# Altium PCB DE-130817.PcbDoc (part 4 of 4)
Units mil, origin at the board's own origin, x right, y up, seen from the top; angles counter-clockwise.
Board outline 5915.54 x 7594.09 mil, 2 copper layers (Top Layer, Bottom Layer), stack 12.8 mil thick; 405 components, 290 nets, 1180 pads, 331 vias.
Unrouted connection lines stored in the file: 1.
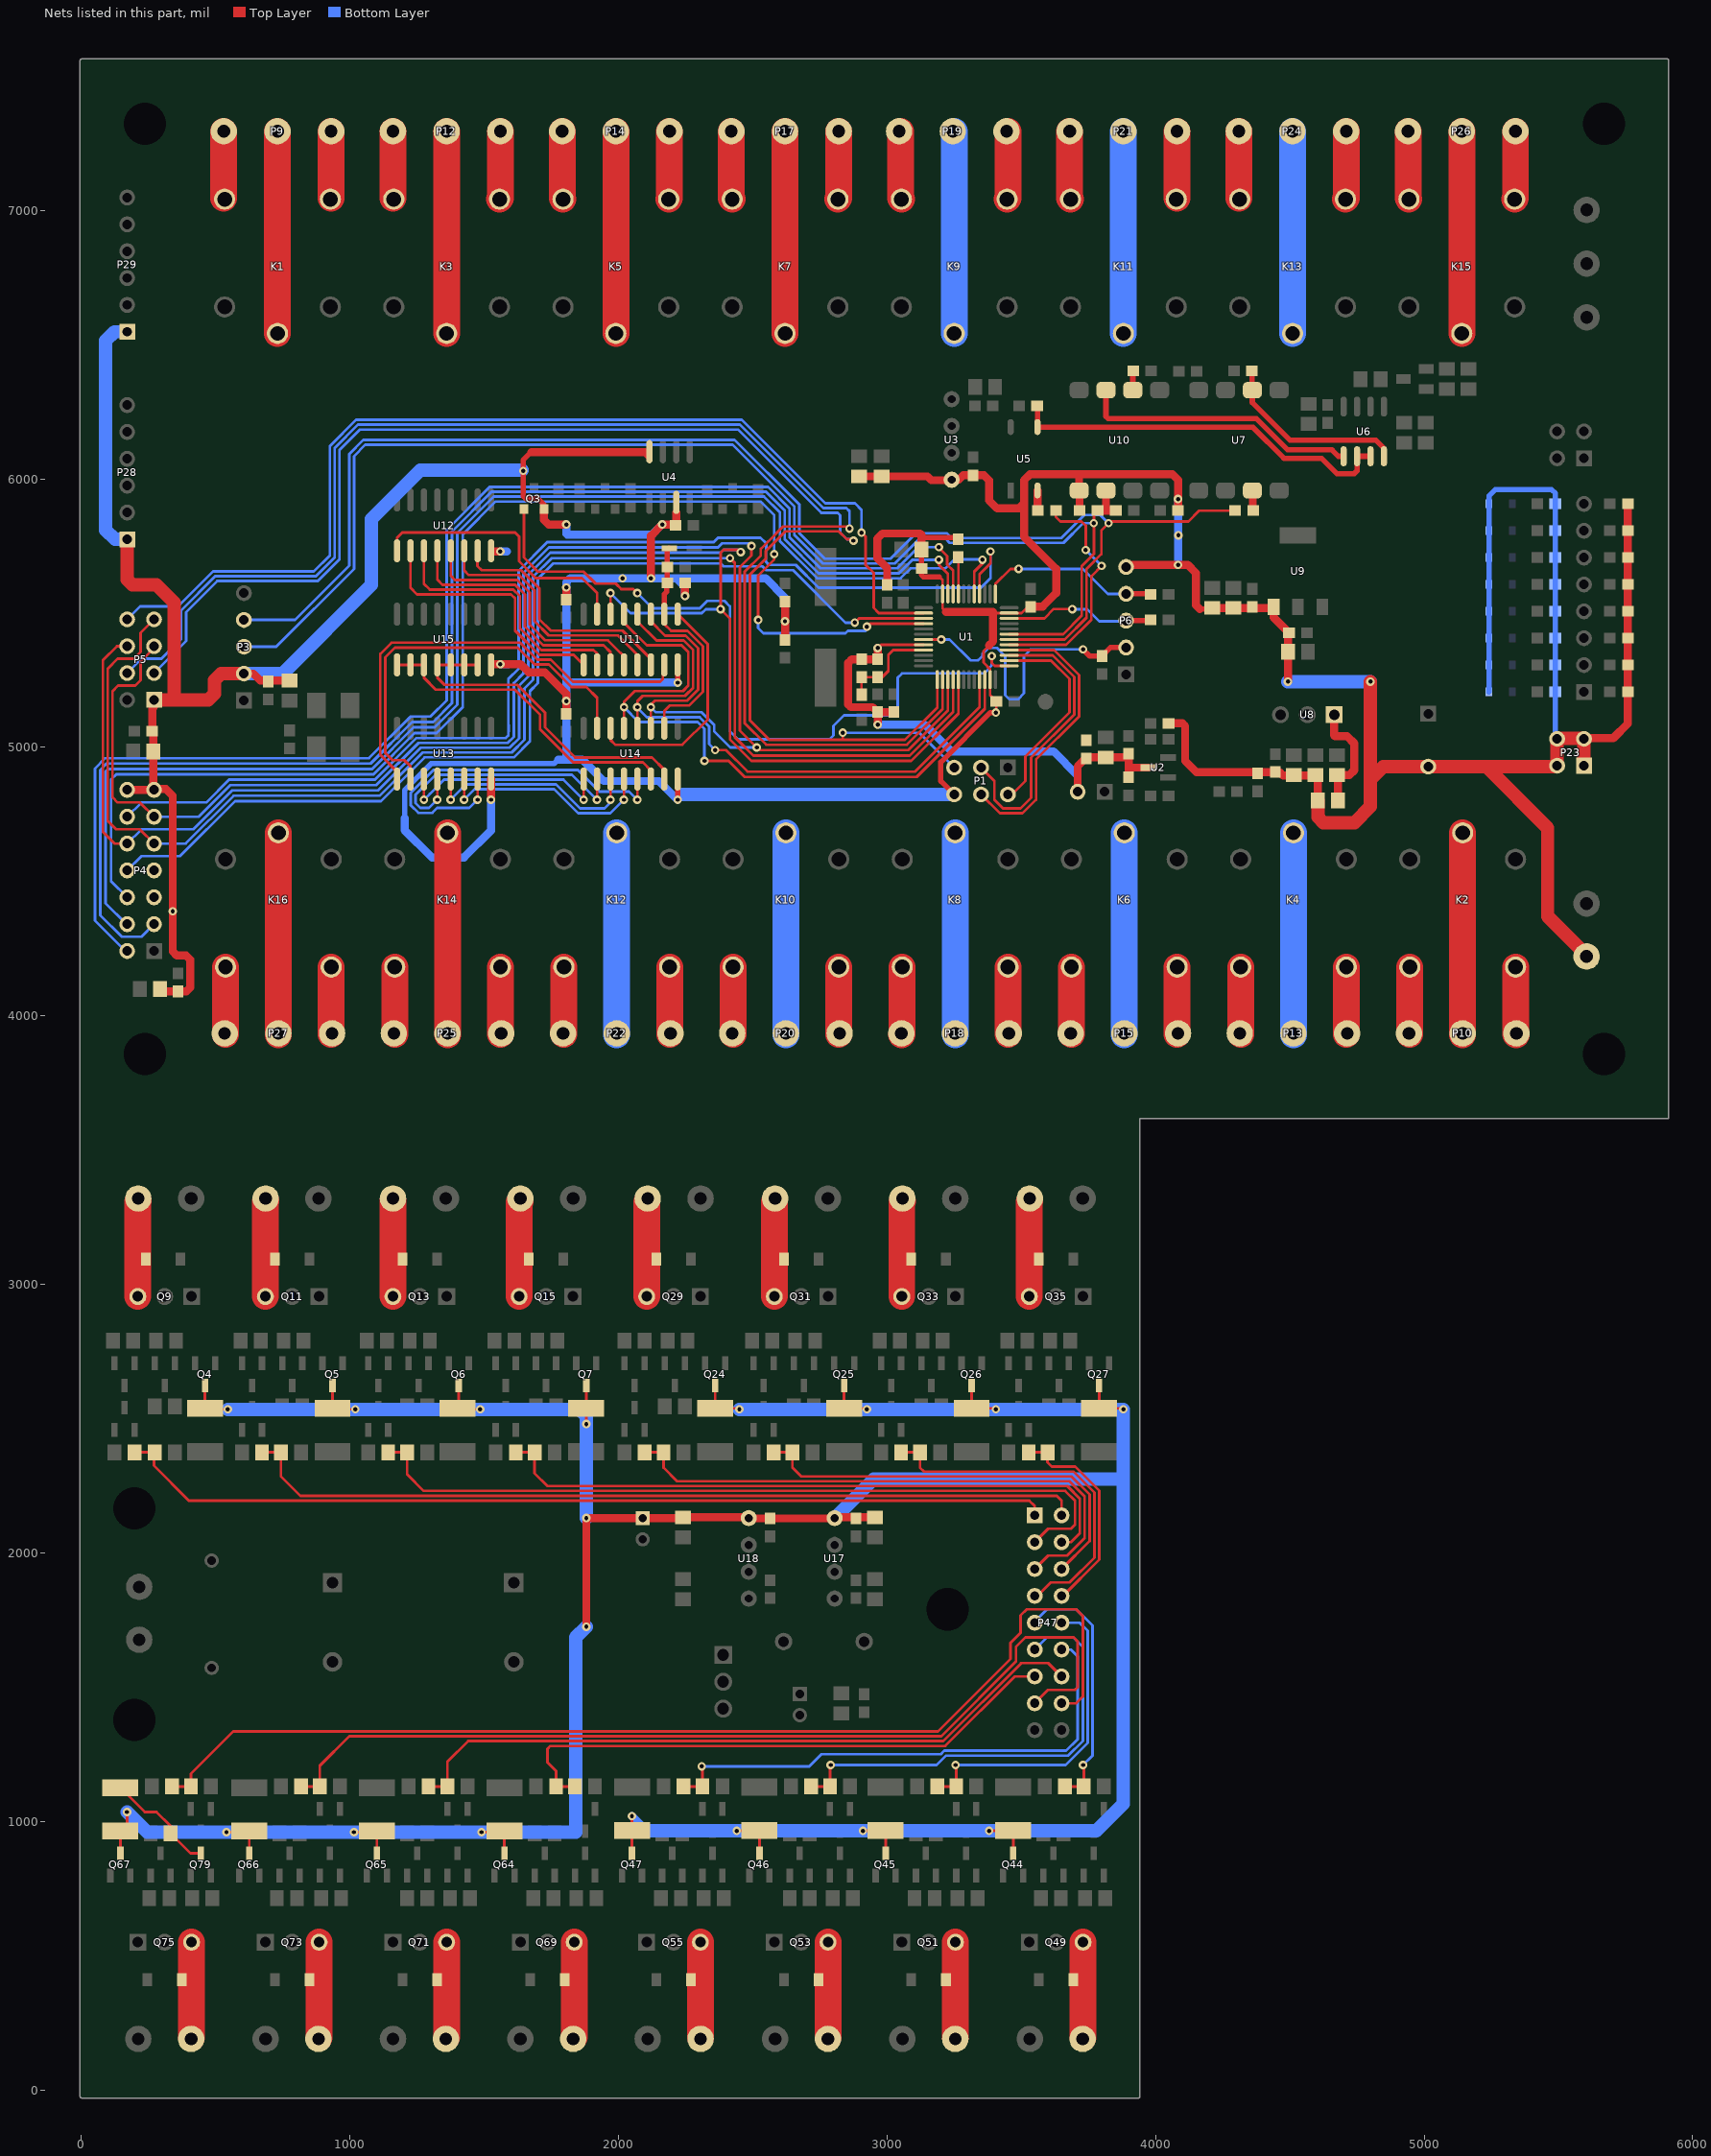
[diagram p3: the nets of this part, all layers, seen from the top]

## Via types
v1: diameter 31.5, hole 15.75, Top Layer to Bottom Layer, 331 vias

## Nets (pads, with @x,y where several pads share a name; then routed paths per layer and width w, separated by ;. In a path a pad name is that pad's centre, name@x,y a point inside that pad or via, vN(x,y) a via of type N, cw(c..) or ccw(c..) an arc to the next point about the centre after c; other vN are vias at no path point) (continued)
NetQ79_3: Q79.3 R122.1 R132.2 | length 417.3
  Top Layer w10: R122.1@145,1125.71 235.71,1035 279.8,1035 332.4,982.4 R132.2@332.4,955 406.06,881.34 Q79.3@445,881.34
NetR4_1: R4.1 U1.44 | length 136.6
  Top Layer w10: U1.44@3265.79,5571.45 R4.1@3265.79,5708.06
NetR9_1: R9.1 U5.2 | length 75.6
  Top Layer w30: U5.2@3560.32,5957 3560.32,5883.54 R9.1@3561.85,5882
NetR10_1: R10.1 U5.3 U6.2 U6.3 | length 1449.6
  Top Layer w20: R10.1@3558.78,6272 3560.32,6270.46 U5.3@3560.32,6193.22 3561.54,6192 4363,6192 4478,6077 4618,6077 4675,6020 4740,6020 4750,6030 4750,6084.16 U6.2@4750.32,6084.48 U6.3@4800.32,6084.48
NetR12_2: R12.2 U6.4 U7.6 | length 708.6
  Top Layer w20: R12.2@4358.78,6402 4358.78,6332.55 U7.6@4360.32,6331.02 4360.32,6284.68 4500,6145 4820,6145 4850.32,6114.68 U6.4@4850.32,6084.48
NetR15_2: R15.2 U7.3 | length 75.6
  Top Layer w30: U7.3@4360.32,5957 4361.85,5955.46 R15.2@4361.85,5882
NetR18_1: R18.1 U10.2 | length 71.6
  Top Layer w20: U10.2@3915.32,6331.02 3915.32,6400.46 R18.1@3916.85,6402
NetR20_1: R20.1 R21.2 U8.1 | length 433.2
  Top Layer w30: U8.1@4665.32,5122 4665,5121.68 4665,5045 4668.34,5041.66 4713.34,5041.66 4740,5015 4740,4915 4721.72,4896.72 R21.2@4675.32,4896.72 4679.25,4892.79 R20.1@4679.25,4802
NetU6_1: U6.1 U10.3 | length 1044.6
  Top Layer w20: U10.3@3815.32,6331.02 3815.32,6232.9 3823.22,6225 4375,6225 4492,6108 4657,6108 4680.52,6084.48 U6.1@4700.32,6084.48
NetU11_1: U11.1 U12.2 | length 972.1
  Top Layer w10: U12.2@1225.32,5732.51 1225.32,5594.68 1250,5570 1600,5570 1615,5555 1615,5435 1705,5345 1832.83,5345 U11.1@1870.32,5307.51
NetU11_2: U11.2 U12.3 | length 988
  Top Layer w10: U12.3@1275.32,5732.51 1275.32,5609.68 1297,5588 1607.46,5588 1633,5562.46 1633,5442.46 1712.46,5363 1907,5363 1920.32,5349.68 U11.2@1920.32,5307.51
NetU11_3: U11.3 U12.4 | length 982.1
  Top Layer w10: U12.4@1325.32,5732.51 1325.32,5624.68 1344,5606 1614.91,5606 1651,5569.91 1651,5449.91 1719.91,5381 1944,5381 1970.32,5354.68 U11.3@1970.32,5307.51
NetU11_4: U11.4 U12.5 | length 964.6
  Top Layer w10: U12.5@1375.32,5732.51 1375.32,5639.68 1391,5624 1622.37,5624 1669,5577.37 1669,5457.37 1727.37,5399 1960.23,5399 2007.54,5351.68 2008.32,5351.68 2020.32,5339.68 U11.4@2020.32,5307.51
NetU11_5: U11.5 U12.6 | length 952.7
  Top Layer w10: U12.6@1425.32,5732.51 1425.32,5659.68 1443,5642 1629.82,5642 1687,5584.82 1687,5470 1740,5417 1998,5417 2070.32,5344.68 U11.5@2070.32,5307.51
NetU11_6: U11.6 U12.7 | length 935.4
  Top Layer w10: U12.7@1475.32,5732.51 1475,5732.2 1475,5675 1490,5660 1637.28,5660 1705,5592.28 1705,5477.46 1747.46,5435 2015,5435 2120.32,5329.68 U11.6@2120.32,5307.51
NetU11_7: U11.7 U13.1 | length 1679.6
  Top Layer w10: U13.1@1175.32,4882.51 1175.32,4909.68 1113,4972 1113,5348 1155,5390 1634.54,5390 1697.54,5327 1748,5327 1830,5245 2155,5245 2165,5255 2165,5302.2 U11.7@2170.32,5307.51
NetU11_9: U11.9 U14.14 | length 890.5
  Top Layer w10: U14.14@1970.32,5071.49 1970.32,5027.68 1988,5010 2238,5010 2332,5104 2332,5384.82 U11.9@2220.32,5496.49
NetU11_15: U11.15 U12.1 | length 1026.5
  Top Layer w10: U12.1@1175.32,5732.51 1175.32,5780.32 1195,5800 1615,5800 1630,5785 1630,5692.73 1691.73,5631 1864,5631 1920.32,5574.68 U11.15@1920.32,5496.49
NetU13_2: U13.2 U14.15 | length 1513.7
  Top Layer w10: U13.2@1225.32,4882.51 1225.32,4929.68 1202.27,4952.73 1157.73,4952.73 1131,4979.46 1131,5336 1167,5372 1625,5372 1688,5309 1740.54,5309 1824.54,5225 1880,5225 1920.32,5184.68 U14.15@1920.32,5071.49
NetU13_3: U13.3 U14.1 | length 811.5
  Top Layer w10: v1@1275.32,4805.32 U13.3@1275.32,4882.51 ; v1@1870.32,4805.32 U14.1@1870.32,4882.51
  Bottom Layer w10: v1(1275,4805) 1297,4827 1297.46,4827 1350.46,4880 1795,4880 v1(1870,4805)
NetU13_4: U13.4 U14.2 | length 1032.8
  Top Layer w10: v1(1325,4805) 1325.32,4805.32 U13.4@1325.32,4882.51 ; v1(1920,4805) 1920.32,4805.32 U14.2@1920.32,4882.51
  Bottom Layer w10: v1(1325,4805) 1294.25,4774.25 1262.26,4774.25 1244.25,4792.26 1244.25,4823.8 1318.46,4898 1827,4898 v1(1920,4805)
NetU13_5: U13.5 U14.3 | length 829.4
  Top Layer w10: v1@1375.32,4805.32 U13.5@1375.32,4882.51 ; v1(1970,4805) 1970.32,4805.32 U14.3@1970.32,4882.51
  Bottom Layer w10: v1(1375,4805) 1432,4862 1768,4862 1857,4773 1948,4773 1970,4795 v1(1970,4805)
NetU13_6: U13.6 U14.4 | length 823.1
  Top Layer w10: v1@1425.32,4805.32 U13.6@1425.32,4882.51 ; v1@2020.32,4805.32 U14.4@2020.32,4882.51
  Bottom Layer w10: v1(1425,4805) 1464,4844 1760.54,4844 1849.54,4755 1970,4755 v1(2020,4805)
NetU13_7: U13.7 U14.5 | length 1406.9
  Top Layer w10: v1@1475.32,4805.32 U13.7@1475.32,4882.51 ; v1(2070,4805) 2070.32,4805.32 U14.5@2070.32,4882.51
  Bottom Layer w10: v1(1475,4805) 1444.25,4774.25 1324.25,4774.25 1306.25,4756.25 1254.81,4756.25 1226.25,4784.81 1226.25,4831.25 1311,4916 1849,4916 1929.25,4835.75 2039.25,4835.75 v1(2070,4805)
NetU14_6: U14.6 U15.1 U15.2 U15.3 | length 1200.1
  Top Layer w10: U15.1@1175.32,5307.51 U15.2@1225.32,5307.51 U15.3@1275.32,5307.51 1275.32,5259.68 1320,5215 1615,5215 1708,5122 1708,5067 1831,4944 2091,4944 2120.32,4914.68 U14.6@2120.32,4882.51
NetU14_7: U14.7 U15.4 U15.5 U15.6 U15.7 | length 1251.3
  Top Layer w10: U15.7@1475.32,5307.51 U15.6@1425.32,5307.51 U15.5@1375.32,5307.51 U15.4@1325.32,5307.51 1325.32,5259.68 1352,5233 1622.46,5233 1726,5129.46 1726,5074.46 1838.46,4962 2125,4962 2170.32,4916.68 U14.7@2170.32,4882.51
NRF24L01_CE: P1.5 P5.3 U1.13 | length 5889
  Top Layer w10: 2835,5028 v1(2835,5055) ; v1@2870,5775 2850,5775 2820,5805 2621.52,5805 2548,5731.48 2548,5703 2489.25,5644.25 2489.25,5100.75 2562,5028 3066.18,5028 3187.05,5148.87 U1.13@3187.05,5252.55
  Bottom Layer w10: P5.3@270.32,5277 390,5396.68 390,5504.09 505.44,5619.53 880.53,5619.53 961,5700 961,6107.37 1037.63,6184 2444.65,6184 2755.09,5873.56 2816.44,5873.56 2825,5865 2825,5800 2850,5775 2870,5775 v1(2875,5770) ; v1(2835,5055) 2835.75,5054.25 3120.75,5054.25 P1.5@3250,4925
NRF24L01_CSN: P5.4 U1.14 | length 5562.8
  Top Layer w10: v1@2860,5810 2850,5820 2853,5823 2613.46,5823 2557.46,5767 2557,5767 2530,5740 2530,5715 2470,5655 2470,5090 2550,5010 3073.63,5010 3206.73,5143.1 U1.14@3206.73,5252.55
  Bottom Layer w10: P5.4@170.32,5277 213.32,5320 215,5320 225,5330 297.86,5330 370,5402.14 370,5509.54 497.98,5637.53 873.07,5637.53 943,5707.46 943,6114.82 1030.18,6202 2452.1,6202 2762.54,5891.56 2848.44,5891.56 2860,5880 v1@2860,5810
  other v1: 2860,5815
NRF24L01_IRQ: P5.8 U1.2 | length 3997.4
  Top Layer w10: v1(2905,5800) 2920,5785 2920,5680 2950,5650 2950,5520 2969.42,5500.58 U1.2@3135.87,5500.58
  Bottom Layer w10: P5.8@170.32,5477 218.32,5525 360,5525 490.53,5655.53 865.62,5655.53 925,5714.91 925,6122.28 1022.72,6220 2459.56,6220 2770,5909.56 2880.44,5909.56 2905,5885 v1(2905,5800)
NRF905_AM: P4.7
NRF905_CD: P4.6 U1.4 | length 4862.9
  Top Layer w10: v1(2520,5475) 2511,5475 2520,5484 2520,5640 2580,5700 v1(2580,5720) ; v1(2925,5450) 2936.21,5461.21 U1.4@3135.87,5461.21
  Bottom Layer w10: P4.6@170.32,4442 110,4502.32 110,4880 130,4900 1087.72,4900 1240.72,5053 1323,5053 1420,5150 1420,5793.63 1542.37,5916 2529,5916 2580,5865 v1(2580,5720) ; v1(2520,5475) 2520,5445 2540,5425 2845,5425 2854.25,5434.25 2919.25,5434.25 2925,5440 v1(2925,5450)
NRF905_CSN: P4.12 U1.40 | length 4391
  Top Layer w10: U1.40@3344.53,5571.45 3344.53,5645.04 3385.75,5686.26 v1@3385.75,5729.25
  Bottom Layer w10: P4.12@170.32,4742 223.32,4795 465,4795 550,4880 1093.18,4880 1248.18,5035 1580,5035 1590,5045 1590,5058 1590.75,5058.75 1590.75,5084.22 1590,5084.97 1590,5255 1628,5293 1628,5658 1734.72,5764.72 2354.72,5764.72 2370.75,5780.75 2529.25,5780.75 2550,5760 2550,5733.48 2549.25,5732.74 2549.25,5690.75 2560,5680 2660,5680 2745,5595 3350,5595 3385.75,5630.75 3385.75,5729.25 v1(3385,5730)
NRF905_DR: P4.8 U1.3 | length 3873.7
  Top Layer w10: v1(2880,5465) 2895.9,5480.9 U1.3@3135.87,5480.9
  Bottom Layer w10: P4.8@170.32,4542 223.32,4595 366.82,4595 571.82,4800 1115,4800 1278,4963 1609.82,4963 1670,5023.18 1670,5210 1700,5240 1700,5628 1757,5685 2380,5685 2390.75,5674.25 2535.75,5674.25 2550,5660 2650,5660 2845.58,5464.42 v1@2880,5464.42
NRF905_PWR_UP: P4.4 U1.41 | length 5025.2
  Top Layer w10: U1.41@3324.84,5571.45 3324.84,5654.84 3355,5685 v1(3355,5699)
  Bottom Layer w10: P4.4@170.32,4342 167.54,4342 90,4419.54 90,4910.91 99.09,4920 1082.27,4920 1237.27,5075 1315.46,5075 1400,5159.54 1400,5799.09 1534.91,5934 2541.91,5934 2601,5874.91 2601,5768.09 2739.09,5630 3050.91,5630 3087.96,5667.04 3217.04,5667.04 3250,5700 3354,5700 v1(3355,5699)
NRF905_TRX_CE: P4.3 U1.46 | length 5071.1
  Top Layer w10: v1(3193,5699) 3193,5680 3226.42,5646.58 U1.46@3226.42,5571.45
  Bottom Layer w10: P4.3@270.32,4342 223.32,4295 150,4295 70,4375 70,4916.37 93.63,4940 1076.81,4940 1231.81,5095 1310,5095 1380,5165 1380,5804.54 1527.46,5952 2549.37,5952 2619,5882.37 2619,5775.54 2745.54,5649 3044.46,5649 3094.46,5699 v1(3193,5699)
NRF905_TX_EN: P4.2 U1.45 | length 5097.8
  Top Layer w10: v1@3200,5736 3223.75,5712.25 3223.75,5681.25 3246.1,5658.9 U1.45@3246.1,5571.45 ; v1@3200,5746.75 v1@3200,5756.75
  Bottom Layer w10: P4.2@170.32,4242 162.54,4242 50,4354.54 50,4921.82 88.18,4960 1071.35,4960 1226.35,5115 1300,5115 1360,5175 1360,5810 1520,5970 2556.82,5970 2637,5889.82 2637,5783 2753,5667 3037,5667 3116,5746 v1(3193,5746)
NRF905_UCLK: P4.5
NRST: P6.2 R5.1 U1.7 | length 1156.5
  Top Layer w10: U1.7@3135.87,5402.16 3201.84,5402.16 v1(3202,5402)
  Top Layer w20: v1(3730,5365) 3754.54,5340.46 R5.1@3800.32,5340.46 3831.85,5372 P6.2@3890.32,5372
  Bottom Layer w10: v1(3202,5402) 3233,5402 3310.75,5324.25 3337.74,5324.25 3338.48,5325 3340,5325 3355.75,5340.75 3355.75,5349.23 3377.26,5370.75 3409.25,5370.75 3440,5340 3440,5195 3455.75,5179.25 3487.74,5179.25 3510,5201.52 3510,5340 3535,5365 v1(3730,5365)
PWM_0: P47.1 R51.1 R63.2 | length 3503.4
  Top Layer w10: R51.1@197.4,2375 R63.2@272.6,2375 270,2372.4 270,2325 400,2195 3530,2195 3550,2175 P47.1@3550,2140
PWM_0_OUT: D13.2 P30.1 Q9.3 | length 355.7
  Top Layer w100: Q9.3@210,2955 210,3308.43 P30.1@211.57,3310
PWM_1: P47.2 R53.1 R64.2 | length 3159.6
  Top Layer w10: R53.1@672.4,2375 R64.2@742.6,2375 742.6,2285.4 815,2213 3632,2213 3650,2195 P47.2@3650,2140
PWM_1_OUT: D14.2 P31.1 Q11.3 | length 355.4
  Top Layer w100: Q11.3@685,2955 685,3309.14 P31.1@685.86,3310
PWM_2: P47.3 R57.1 R65.2 | length 2946.9
  Top Layer w10: R57.1@1142.4,2375 R65.2@1212.6,2375 1212.6,2293.4 1275,2231 3664,2231 3700,2195 3700,2105 3685,2090 3600,2090 P47.3@3550,2040
PWM_2_OUT: D15.2 P32.1 Q13.3 | length 355.1
  Top Layer w100: Q13.3@1160,2955 1160,3309.85 P32.1@1160.15,3310
PWM_3: P47.4 R59.1 R66.2 | length 2429.2
  Top Layer w10: R59.1@1617.4,2375 R66.2@1687.6,2375 1687.6,2296.4 1735,2249 3671.46,2249 3718,2202.46 3718,2073 3685,2040 P47.4@3650,2040
PWM_3_OUT: D16.2 P33.1 Q15.3 | length 356.8
  Top Layer w100: Q15.3@1630,2955 1630,3305.57 P33.1@1634.43,3310
PWM_4: P47.5 R75.1 R87.2 | length 2128.7
  Top Layer w10: R75.1@2097.4,2375 R87.2@2167.6,2375 2167.6,2317.4 2218,2267 3678.91,2267 3736,2209.91 3736,2056 3670,1990 3600,1990 P47.5@3550,1940
PWM_4_OUT: D17.2 P34.1 Q29.3 | length 351.3
  Top Layer w100: Q29.3@2105,2955 P34.1@2105,3306.28
PWM_5: P47.6 R77.1 R88.2 | length 1596.1
  Top Layer w10: R77.1@2577.4,2375 R88.2@2647.6,2375 2647.6,2317.4 2680,2285 3686.37,2285 3754,2217.37 3754,2044 P47.6@3650,1940
PWM_5_OUT: D18.2 P35.1 Q31.3 | length 352
  Top Layer w100: Q31.3@2580,2955 P35.1@2580,3307
PWM_6: P47.7 R81.1 R89.2 | length 1339.2
  Top Layer w10: R81.1@3052.4,2375 R89.2@3122.6,2375 3122.6,2317.4 3137,2303 3693.82,2303 3772,2224.82 3772,1982 3680,1890 3610,1890 3560,1840 P47.7@3550,1840
PWM_6_OUT: D19.2 P36.1 Q33.3 | length 355.9
  Top Layer w100: Q33.3@3055,2955 3055,3307.71 P36.1@3057.29,3310
PWM_7: P47.8 R83.1 R90.2 | length 797.2
  Top Layer w10: R83.1@3527.4,2375 R90.2@3597.6,2375 3597.6,2337.4 3614,2321 3701.28,2321 3790,2232.28 3790,1974.54 3655.46,1840 P47.8@3650,1840
PWM_7_OUT: D20.2 P37.1 Q35.3 | length 355.7
  Top Layer w100: Q35.3@3530,2955 3530,3308.43 P37.1@3531.57,3310
PWM_8: P47.9 R99.1 R111.2 | length 945.6
  Top Layer w10: R111.2@3662.4,1130 R99.1@3732.6,1130 v1@3732.6,1207.4
  Bottom Layer w10: P47.9@3550,1740 3550,1745 3595,1790 3705,1790 3765,1730 3765,1245 v1(3730,1210)
PWM_8_OUT: D21.2 P39.1 Q49.3 | length 355
  Top Layer w100: P39.1@3730,195 Q49.3@3730,550
PWM_9: P47.10 R101.1 R112.2 | length 1201
  Top Layer w10: R112.2@3187.4,1130 R101.1@3257.6,1130 v1@3257.6,1207.4
  Bottom Layer w10: v1(3255,1210) 3665,1210 3747,1292 3747,1710 3717,1740 P47.10@3650,1740
PWM_9_OUT: D22.2 P40.1 Q51.3 | length 354.3
  Top Layer w100: P40.1@3255,195.71 Q51.3@3255,550
PWM_10: P47.11 R105.1 R113.2 | length 1689.9
  Top Layer w10: R113.2@2717.4,1130 R105.1@2787.6,1130 2787.6,1207.6 v1(2790,1210)
  Bottom Layer w10: v1(2790,1210) 3185,1210 3220.23,1245.23 3674.77,1245.23 3729,1299.46 3729,1650 3694,1685 3595,1685 P47.11@3550,1640
PWM_10_OUT: D23.2 P41.1 Q53.3 | length 353.6
  Top Layer w100: P41.1@2780,196.43 Q53.3@2780,550
PWM_11: P47.12 R107.1 R114.2 | length 1967.5
  Top Layer w10: R114.2@2242.4,1130 R107.1@2312.6,1130 2312.6,1202.4 v1(2310,1205)
  Bottom Layer w10: v1(2310,1205) 2710,1205 2755,1250 3199.54,1250 3212.77,1263.23 3667.32,1263.23 3710,1305.91 3710,1615 3685,1640 P47.12@3650,1640
PWM_11_OUT: D24.2 P42.1 Q55.3 | length 352.9
  Top Layer w100: P42.1@2305,197.14 Q55.3@2305,550
PWM_12: P47.13 R123.1 R135.2 | length 2150.5
  Top Layer w10: R123.1@1837.6,1130 R135.2@1767.4,1130 1767.4,1187.6 1735,1220 1735,1270 1746,1281 3216.91,1281 3475.91,1540 P47.13@3550,1540
PWM_12_OUT: D25.2 P43.1 Q69.3 | length 355.9
  Top Layer w100: P43.1@1832.86,195 1835,197.14 Q69.3@1835,550
PWM_13: P47.14 R125.1 R136.2 | length 2623
  Top Layer w10: R136.2@1292.4,1130 R125.1@1362.6,1130 1362.6,1221.6 1440,1299 3209.46,1299 3498,1587.54 3498,1588.46 3499.54,1590 3600,1590 P47.14@3650,1540
PWM_13_OUT: D26.2 P44.1 Q71.3 | length 353.6
  Top Layer w100: P44.1@1360,196.43 Q71.3@1360,550
PWM_14: P47.15 R129.1 R137.2 | length 3561.2
  Top Layer w10: R137.2@817.4,1130 R129.1@887.6,1130 887.6,1207.6 997,1317 3202,1317 3480,1595 3480,1650 3515,1685 3695,1685 3710,1670 3710,1500 3700,1490 3600,1490 P47.15@3550,1440
PWM_14_OUT: D27.2 P45.1 Q73.3 | length 355.3
  Top Layer w100: P45.1@884.29,195 885,195.71 Q73.3@885,550
PWM_15: P47.16 R131.1 R138.2 | length 4167.8
  Top Layer w10: R138.2@337.4,1130 R131.1@407.6,1130 407.6,1177.6 565,1335 3190,1335 3460,1605 3460,1665 3497.37,1702.37 3497.37,1767.37 3520,1790 3705,1790 3730,1765 3730,1465 3705,1440 P47.16@3650,1440
PWM_15_OUT: D28.2 P46.1 Q75.3 | length 355
  Top Layer w100: P46.1@410,195 Q75.3@410,550
PWM_OE: Q3.1 U1.25 | length 2832.7
  Top Layer w10: Q3.1@1647.6,5887.63 1648,5887.23 1648,5707 1700,5655 1870,5655 1915,5610 1990,5610 2010,5590 2055,5590 v1(2070,5575) ; v1(3390,5340) 3390,5315 3401.27,5303.73 U1.25@3454.77,5303.73
  Bottom Layer w10: v1(2070,5575) 2127,5518 2302.54,5518 2330.29,5545.75 2394.25,5545.75 2415,5525 2415,5060 2445,5030 2501.52,5030 2502.26,5030.75 2785.75,5030.75 2800,5045 2800,5080 2840,5120 3020,5120 3040,5140 3040,5260 3055.75,5275.75 3360.75,5275.75 3390,5305 v1(3390,5340)
REL_C_0: K1.1 P9.2 | length 753
  Top Layer w100: K1.1@730,6542 P9.2@730,7295
REL_C_1: K3.1 P12.2 | length 753
  Top Layer w100: K3.1@1360.05,6542 P12.2@1360.05,7295
REL_C_2: K5.1 P14.2 | length 753
  Top Layer w100: K5.1@1990.09,6542 P14.2@1990.09,7295
REL_C_3: K7.1 P17.2 | length 753
  Top Layer w100: K7.1@2620.14,6542 P17.2@2620.14,7295
REL_C_4: K9.1 P19.2 | length 753
  Bottom Layer w100: K9.1@3250.18,6542 P19.2@3250.18,7295
REL_C_5: K11.1 P21.2 | length 753
  Bottom Layer w100: K11.1@3880.23,6542 P21.2@3880.23,7295
REL_C_6: K13.1 P24.2 | length 753
  Bottom Layer w100: K13.1@4510.27,6542 P24.2@4510.27,7295
REL_C_7: K15.1 P26.2 | length 753
  Top Layer w100: K15.1@5140.32,6542 P26.2@5140.32,7295
REL_C_8: K2.1 P10.2 | length 753
  Top Layer w100: P10.2@5143.63,3929 K2.1@5143.63,4682
REL_C_9: K4.1 P13.2 | length 753
  Bottom Layer w100: P13.2@4513.59,3929 K4.1@4513.59,4682
REL_C_10: K6.1 P15.2 | length 753
  Bottom Layer w100: P15.2@3883.54,3929 K6.1@3883.54,4682
REL_C_11: K8.1 P18.2 | length 753
  Bottom Layer w100: P18.2@3253.5,3929 K8.1@3253.5,4682
REL_C_12: K10.1 P20.2 | length 753
  Bottom Layer w100: P20.2@2623.45,3929 K10.1@2623.45,4682
REL_C_13: K12.1 P22.2 | length 753
  Bottom Layer w100: P22.2@1993.41,3929 K12.1@1993.41,4682
REL_C_14: K14.1 P25.2 | length 753
  Top Layer w100: P25.2@1363.36,3929 K14.1@1363.36,4682
REL_C_15: K16.1 P27.2 | length 753
  Top Layer w100: P27.2@733.32,3929 K16.1@733.32,4682
REL_NC_0: K1.4 P9.1 | length 249.9
  Top Layer w100: K1.4@530,7045.15 P9.1@530,7295
REL_NC_1: K3.4 P12.1 | length 249.9
  Top Layer w100: K3.4@1160.05,7045.15 P12.1@1160.05,7295
REL_NC_2: K5.4 P14.1 | length 254.3
  Top Layer w100: P14.1@1790.09,7295 1790.09,7045.15 K5.4@1793.24,7042
REL_NC_3: K7.4 P17.1 | length 254.3
  Top Layer w100: P17.1@2420.14,7295 2420.14,7045.15 K7.4@2423.29,7042
REL_NC_4: K9.4 P19.1 | length 254.3
  Top Layer w100: P19.1@3050.18,7295 3050.18,7045.15 K9.4@3053.33,7042
REL_NC_5: K11.4 P21.1 | length 254.3
  Top Layer w100: P21.1@3680.23,7295 3680.23,7045.15 K11.4@3683.38,7042
REL_NC_6: K13.4 P24.1 | length 249.9
  Top Layer w100: K13.4@4310.27,7045.15 P24.1@4310.27,7295
REL_NC_7: K15.4 P26.1 | length 254.3
  Top Layer w100: P26.1@4940.32,7295 4940.32,7045.15 K15.4@4943.47,7042
REL_NC_8: K2.4 P10.1 | length 254.3
  Top Layer w100: K2.4@5340.48,4182 5340.48,3932.15 P10.1@5343.63,3929
REL_NC_9: K4.4 P13.1 | length 249.9
  Top Layer w100: P13.1@4710.44,3932.15 K4.4@4710.44,4182
REL_NC_10: K6.4 P15.1 | length 249.9
  Top Layer w100: P15.1@4080.39,3932.15 K6.4@4080.39,4182
REL_NC_11: K8.4 P18.1 | length 249.9
  Top Layer w100: P18.1@3450.35,3932.15 K8.4@3450.35,4182
REL_NC_12: K10.4 P20.1 | length 249.9
  Top Layer w100: P20.1@2820.3,3932.15 K10.4@2820.3,4182
REL_NC_13: K12.4 P22.1 | length 249.9
  Top Layer w100: P22.1@2190.26,3932.15 K12.4@2190.26,4182
REL_NC_14: K14.4 P25.1 | length 254.3
  Top Layer w50: P25.1@1560.21,3932.15 P25.1@1563.36,3929
  Top Layer w100: P25.1@1560.21,3932.15 K14.4@1560.21,4182
REL_NC_15: K16.4 P27.1 | length 254.3
  Top Layer w50: P27.1@930.17,3932.15 P27.1@933.32,3929
  Top Layer w100: P27.1@930.17,3932.15 K16.4@930.17,4182
REL_NO_0: K1.3 P9.3 | length 249.9
  Top Layer w100: K1.3@930,7045.15 P9.3@930,7295
REL_NO_1: K3.3 P12.3 | length 254.3
  Top Layer w100: K3.3@1556.9,7042 1560.05,7045.15 P12.3@1560.05,7295
REL_NO_2: K5.3 P14.3 | length 254.3
  Top Layer w100: K5.3@2186.94,7042 2190.09,7045.15 P14.3@2190.09,7295
REL_NO_3: K7.3 P17.3 | length 254.3
  Top Layer w100: K7.3@2816.99,7042 2820.14,7045.15 P17.3@2820.14,7295
REL_NO_4: K9.3 P19.3 | length 254.3
  Top Layer w100: K9.3@3447.03,7042 3450.18,7045.15 P19.3@3450.18,7295
REL_NO_5: K11.3 P21.3 | length 249.9
  Top Layer w100: K11.3@4080.23,7045.15 P21.3@4080.23,7295
REL_NO_6: K13.3 P24.3 | length 254.3
  Top Layer w100: K13.3@4707.12,7042 4710.27,7045.15 P24.3@4710.27,7295
REL_NO_7: K15.3 P26.3 | length 254.3
  Top Layer w100: K15.3@5337.17,7042 5340.32,7045.15 P26.3@5340.32,7295
REL_NO_8: K2.3 P10.3 | length 249.9
  Top Layer w100: P10.3@4946.78,3932.15 K2.3@4946.78,4182
REL_NO_9: K4.3 P13.3 | length 249.9
  Top Layer w100: P13.3@4316.74,3932.15 K4.3@4316.74,4182
REL_NO_10: K6.3 P15.3 | length 249.9
  Top Layer w100: P15.3@3686.69,3932.15 K6.3@3686.69,4182
REL_NO_11: K8.3 P18.3 | length 254.3
  Top Layer w100: P18.3@3053.5,3929 3056.65,3932.15 K8.3@3056.65,4182
REL_NO_12: K10.3 P20.3 | length 249.9
  Top Layer w100: P20.3@2426.6,3932.15 K10.3@2426.6,4182
REL_NO_13: K12.3 P22.3 | length 249.9
  Top Layer w100: P22.3@1796.56,3932.15 K12.3@1796.56,4182
REL_NO_14: K14.3 P25.3 | length 249.9
  Top Layer w100: P25.3@1166.51,3932.15 K14.3@1166.51,4182
REL_NO_15: K16.3 P27.3 | length 254.3
  Top Layer w50: P27.3@533.32,3929 P27.3@536.47,3932.15
  Top Layer w100: P27.3@536.47,3932.15 K16.3@536.47,4182
RS485_DIR: R9.2 U1.29 | length 883.5
  Top Layer w10: U1.29@3454.77,5382.47 3667.47,5382.47 3761,5476 3761,5638 v1(3799,5676) ; R9.2@3628.78,5882 3628.78,5858.22 3645,5842 3724,5842 3740,5826 v1(3740,5735)
  Bottom Layer w10: v1(3740,5735) v1(3799,5676)
SHREG_LCH: U1.21 U11.12 U14.12 | length 2364.1
  Top Layer w10: U14.12@2070.32,5071.49 2070.32,5172.32 2090,5192 2247.46,5192 2278,5222.54 2278,5362.46 2242.23,5398.23 2141.77,5398.23 2070,5470 2070,5496.17 U11.12@2070.32,5496.49 ; v1(2360,4990) 2400,4990 2480,4910 3105,4910 3344.53,5149.53 U1.21@3344.53,5252.55
  Bottom Layer w10: v1(2070,5150) 2070,5148 2105,5113 2302.46,5113 2338,5077.46 2338,5012 v1(2360,4990)
SHREG_OE: U1.22 U11.13 U14.13 | length 2540.7
  Top Layer w10: U14.13@2020.32,5071.49 v1(2020.32,5150) 2020.32,5170.32 2060,5210 2240,5210 2260,5230 2260,5355 2234.77,5380.23 2105.23,5380.23 2020.32,5465.14 U11.13@2020.32,5496.49 ; v1(2320,4950) 2410,4950 2470,4890 3110.46,4890 3364.21,5143.76 U1.22@3364.21,5252.55
  Bottom Layer w10: v1(2020.32,5150) 2075.32,5095 2295,5095 2320,5070 v1(2320,4950)
SHREG_RST: C48.2 D12.2 R39.1 U11.10 U14.10 | length 875.6
  Top Layer w10: U14.10@2170.32,5071.49 2170.32,5136.32 2190,5156 2262.37,5156 2314,5207.63 2314,5377.37 2257.14,5434.23 2195.77,5434.23 2170.32,5459.68 U11.10@2170.32,5496.49
  Top Layer w20: U11.10@2170.32,5496.49 2170.32,5570.32 2180,5580 2180,5610.15 C48.2@2181.85,5612 2181.85,5734.8 D12.2@2189.06,5742
SPI_1_MISO: P4.9 P5.7 U1.16 | length 5689.8
  Top Layer w10: P4.9@270.32,4642 217.32,4695 130,4695 98,4727 98,5293 135,5330 195,5330 220,5355 220,5426.68 P5.7@270.32,5477 ; v1(2415,5705) 2433,5687 2433,5038.52 2502.26,4969.25 3083.8,4969.25 3246.1,5131.56 U1.16@3246.1,5252.55
  Bottom Layer w10: P4.9@270.32,4642 388.37,4642 566.37,4820 1109.54,4820 1270.54,4981 1602.37,4981 1650,5028.63 1650,5220 1682,5252 1682,5635.63 1751.37,5705 v1(2415,5705)
SPI_1_MOSI: P4.10 P5.6 U1.17 U11.14 | length 6355.5
  Top Layer w10: P4.10@170.32,4642 123,4642 80,4685 80,5325 132,5377 P5.6@170.32,5377 ; U11.14@1970.32,5496.49 v1@1970.32,5574.68 ; v1@2460,5720 2444.25,5735.75 2390.75,5735.75 2380,5725 v1(2380,5515) 2415,5480 2415,5030 2495,4950 3090,4950 3265.79,5125.79 U1.17@3265.79,5252.55
  Bottom Layer w10: P4.10@170.32,4642 223.32,4695 415.91,4695 560.91,4840 1104.09,4840 1263.09,4999 1594.91,4999 1630,5034.09 1630,5230 1664,5264 1664,5643.09 1745.91,5725 2380,5725 2390.75,5735.75 2444.25,5735.75 v1@2460,5720 ; v1(1970,5575) 2045,5500 2310,5500 2325,5515 v1(2380,5515)
  other v1: 2455,5727.5
SPI_1_SCK: P4.11 P5.5 U1.15 U11.11 U14.11 | length 6685.4
  Top Layer w10: P4.11@270.32,4742 217.32,4795 135,4795 116,4814 116,5210 136,5230 200,5230 220,5250 220,5319.54 270.32,5369.86 P5.5@270.32,5377 ; U14.11@2120.32,5071.49 v1(2120.32,5150) 2120.32,5159.32 2135,5174 2254.91,5174 2296,5215.09 2296,5369.91 2249.68,5416.23 2173.77,5416.23 2120.32,5469.68 U11.11@2120.32,5496.49 ; v1(2495,5750) 2495,5715 2452,5672 2452,5063 v1@2518,4997 ; v1(2515,5000) v1@2518,4997 ; U1.15@3226.42,5252.55 3226.42,5137.33 3079.09,4990 2525,4990 v1@2518,4997
  Bottom Layer w10: P4.11@270.32,4742 437.46,4742 555.46,4860 1098.63,4860 1255.63,5017 1587.46,5017 1610,5039.54 1610,5240 1646,5276 1646,5650.54 1740.46,5745 2370.46,5745 2385.46,5760 2490,5760 2490,5755 v1(2495,5750) ; v1(2120.32,5150) 2139.32,5131 2309.91,5131 2356,5084.91 2356,5060 2416,5000 v1(2515,5000)
SPI_2_MISO: P1.3 U1.27 | length 1099
  Top Layer w10: P1.3@3350,4925 3400,4875 3400,4805 3432,4773 3497.09,4773 3537,4812.91 3537,4962.46 3697,5122.46 3697,5262.54 3616.44,5343.1 U1.27@3454.77,5343.1
SPI_2_MOSI: P1.4 U1.28 | length 1084.6
  Top Layer w10: P1.4@3350,4825 3420,4755 3504.54,4755 3552.54,4803 3553,4803 3555,4805 3555,4955 3715,5115 3715,5270 3622.21,5362.79 U1.28@3454.77,5362.79
SPI_2_SCK: P1.2 U1.26 | length 786.3
  Top Layer w10: P1.2@3450,4825 3465,4825 3515,4875 3515,4965.91 3679,5129.91 3679,5255.09 3610.67,5323.42 U1.26@3454.77,5323.42
SWCLK: P6.4 R7.1 U1.37 | length 682.3
  Top Layer w10: U1.37@3403.58,5571.45 3403.58,5608.58 3460,5665 v1(3490,5665)
  Top Layer w20: P6.4@3890.32,5572 R7.1@3986.85,5572
  Bottom Layer w10: v1(3490,5665) 3730,5665 3823,5572 P6.4@3890.32,5572
SWDIO: P6.3 R6.1 U1.34 | length 566.3
  Top Layer w10: U1.34@3454.77,5480.9 3585.9,5480.9 3620.75,5515.75 3689.25,5515.75 v1(3690,5515)
  Top Layer w20: P6.3@3890.32,5472 R6.1@3986.85,5472
  Bottom Layer w10: v1(3690,5515) 3745,5515 3790,5470 3888.32,5470 P6.3@3890.32,5472
USART_1_RX: P3.3 R19.2 R22.2 U1.31 U10.6 | length 4903.7
  Top Layer w10: U1.31@3454.77,5421.84 3655.93,5421.84 3725,5490.91 3725,5675 3771,5721 3771,5869.22 R22.2@3783.78,5882
  Top Layer w30: R22.2@3783.78,5882 R19.2@3851.85,5882 ; 3815.32,5882.32 U10.6@3815.32,5957
  Bottom Layer w10: P3.3@605,5375 725,5375 1015,5665 1015,6085 1057,6127 2425.28,6127 2655,5897.28 2655,5790.46 2760.46,5685 3029.54,5685 3121.29,5776.75 3217.8,5776.75 3232.54,5762 3657,5762 3730,5835 3760,5835 v1@3770,5845
  other v1: 3770,5835
USART_1_TX: P3.4 R15.1 U1.30 | length 5280
  Top Layer w10: U1.30@3454.77,5402.16 3661.7,5402.16 3743,5483.46 3743,5665 3798,5720 3798,5808 3832,5842 4123,5842 4163,5882 R15.1@4296.54,5882
  Bottom Layer w10: P3.4@605,5475 795,5475 997,5677 997,6092.46 1049.54,6145 2432.73,6145 2673,5904.73 2673,5797.91 2767.91,5703 3013.48,5703 3108.48,5798 3222,5798 3240,5780 3649.54,5780 3735.29,5865.75 3794.25,5865.75 v1(3825,5835)
VDDA: C25.2 C26.2 L2.2 U1.9 | length 373.2
  Top Layer w10: L2.2@2905,5196.26 C25.2@2905,5261.54 C26.2@2965,5261.54 2981.54,5261.54 3005,5285 3005,5345 3022.79,5362.79 U1.9@3135.87,5362.79
VDR: C56.1 C57.2 C61.2 C62.2 C83.2 Q4.3 Q5.3 Q6.3 Q7.3 Q24.3 Q25.3 Q26.3 Q27.3 Q44.3 Q45.3 Q46.3 Q47.3 Q64.3 Q65.3 Q66.3 Q67.3 R47.2 R48.2 R49.2 R50.2 R71.2 R72.2 R73.2 R74.2 R95.2 R96.2 R97.2 R98.2 R119.2 R120.2 R121.2 R122.2 U17.4 U18.4 | length 14256.6
  Top Layer w10: Q67.3@145,881.34 R122.2@145,964.29 170,989.29 v1(170,1035) ; Q4.3@460,2623.66 R47.2@460,2538.39 463.39,2535 v1(545,2535) ; v1(540,960) R121.2@620.71,960 ; Q66.3@625,881.34 R121.2@625,964.29 ; Q5.3@935,2623.66 R48.2@935,2538.39 938.39,2535 v1(1020,2535) ; v1(1015,960) 1095.71,960 R120.2@1100,964.29 Q65.3@1100,881.34 ; R49.2@1405,2543.39 Q6.3@1405,2623.66 ; R49.2@1413.39,2535 v1(1485,2535) ; v1(1490,960) R119.2@1570.71,960 ; Q64.3@1575,881.34 R119.2@1575,964.29 ; v1(1880,2480) R50.2@1880,2538.39 Q7.3@1880,2623.66 ; Q47.3@2050,881.34 R98.2@2050,966.61 v1(2050,1020) ; Q24.3@2360,2623.66 R71.2@2360,2538.39 2446.61,2538.39 v1(2450,2535) ; v1(2440,965) 2523.39,965 R97.2@2525,966.61 Q46.3@2525,881.34 ; Q25.3@2840,2623.66 R72.2@2840,2538.39 2921.61,2538.39 v1(2925,2535) ; v1(2910,965) R96.2@2993.39,965 ; Q45.3@2995,881.34 R96.2@2995,966.61 ; Q26.3@3315,2623.66 R73.2@3315,2538.39 3401.61,2538.39 v1(3405,2535) ; v1(3380,965) R95.2@3468.39,965 ; Q44.3@3470,881.34 R95.2@3470,966.61 ; Q27.3@3790,2623.66 R74.2@3790,2538.39 v1@3876.61,2538.39
  Top Layer w30: R49.2@1400,2538.39 R49.2@1405,2543.39 ; v1(1880,1725) v1(1880,2130) ; v1@1885.63,2129.37 C56.1@2090,2129.37 C62.2@2236.97,2129.37 ; C62.2@2240,2132.4 U18.4@2482.6,2132.4 ; U18.4@2486.54,2128.46 C57.2@2565,2128.46 U17.4@2803.46,2128.46 ; U17.4@2807.4,2132.4 C61.2@2955,2132.4
  Bottom Layer w30: v1(2050,1020) 2105,965
  Bottom Layer w50: v1(170,1035) 245,960 v1(540,960) v1(1015,960) v1(1490,960) 1840,960 1840,1685 v1(1880,1725) ; v1(545,2535) v1(1020,2535) v1(1485,2535) 1855,2535 1880,2510 v1(1880,2480) v1(1880,2130) ; 2105,965 v1(2440,965) v1(2910,965) v1(3380,965) 3780,965 3880,1065 v1(3880,2535) v1(3405,2535) v1(2925,2535) v1(2450,2535) ; U17.4@2805,2130 2950,2275 3880,2275
VSS: C2.1 C5.2 C6.2 C7.2 C8.2 C9.2 C10.2 C11.1 C12.1 C13.2 C14.2 C15.1 C16.1 C17.1 C21.1 C22.1 C23.1 C24.1 C28.2 C29.1 C30.1 C31.1 C32.1 C33.1 C34.1 C35.1 C36.1 C37.1 C38.2 C40.1 C41.1 C42.1 C43.1 C44.1 C45.1 C46.1 C47.1 C48.1 C49.1 C50.1 D4.2 D5.2 D6.2 D7.2 D8.2 D9.2 D10.2 D11.2 P1.6 P3.2 P4.13 P4.14 P5.1 P6.5 P8.1 P23.1 P23.2 P23.3 P23.4 P28.1 P29.1 Q3.2 R4.2 R20.2 R22.1 R23.1 R24.1 R25.1 R26.1 R35.1 R36.1 R37.1 R38.1 R145.1 U1.23 U1.35 U1.47 U3.1 U4.4 U4.7 U9.1 U10.5 U11.8 U12.8 U13.8 U14.8 U15.8 | length 24629.8
  Top Layer w10: 3195,5635 3206.73,5623.27 U1.47@3206.73,5571.45 3206.73,5518.27 3220,5505 ; 3375,5505 3379.42,5500.58 3395,5500.58 U1.35@3454.77,5500.58 3500.58,5500.58 3523.54,5523.54 C23.1@3535.32,5523.54 ; 3380,5380 3359.25,5359.25 3359.25,5315.75 3383.9,5291.1 U1.23@3383.9,5252.55 3383.9,5194.95 C24.1@3406.85,5172 3406.85,5131.85 v1(3405,5130)
  Top Layer w20: 1675,6100 1645,6070 1645,5937 1655,5927 1700,5927 1722.4,5904.6 Q3.2@1722.4,5887.63 ; v1(2220.32,4805) U14.8@2220.32,4882.51 ; v1(2220.32,5241) U11.8@2220.32,5307.51 ; C21.1@3127.72,5737 3128,5736.72 3128,5643 3136,5635 3195,5635 ; 3127.72,5770.72 3138.75,5781.75 3265.32,5781.75 R4.2@3265.32,5775.46 ; P1.6@3250,4825 3200,4875 3200,4945.04 3384.96,5130 v1(3405,5130) ; 4165,5515 4205.72,5515 C32.1@4210.32,5519.6
  Top Layer w30: P4.14@170.32,4842 P4.13@270.32,4842 P4.13@267.4,4844.91 ; P5.1@270.32,5177 270.32,5150.32 263.46,5143.46 C10.2@263.46,5060 267.4,5056.06 C9.2@267.4,4985 P4.13@267.4,4844.91 ; C7.2@292.4,4100 300.87,4091.54 C8.2@360,4091.54 391.54,4091.54 405,4105 405,4210 390,4225 355,4225 340,4240 340,4820 315.09,4844.91 P4.13@267.4,4844.91 ; P3.2@605,5275 640,5275 665.6,5249.4 C5.2@775.32,5249.4 ; v1(1525,4805) 1525,4882.2 U13.8@1525.32,4882.51 ; 1540,5310 v1(1560,5310) 1635,5310 1665,5280 1725,5280 1805.32,5199.68 v1(1805.32,5173) C50.1@1805.32,5125.46 ; 1540,5730 v1(1560,5730) ; 1675,6100 2098,6100 U4.4@2110.5,6087.5 ; Q3.2@1722.4,5887.63 1722.4,5847.6 1739.54,5830.46 v1(1805.32,5830.46) ; C49.1@1805.32,5550.46 v1(1805.32,5596) ; v1(2121,5630) 2121,5788.46 v1(2163,5830.46) 2214.46,5830.46 2215.32,5831.32 U4.7@2215.32,5875 ; v1(2248,5564) 2248,5611.22 C48.1@2248.78,5612 ; C12.1@2620.32,5400.46 C11.1@2620.32,5543.54 ; C15.1@2895.32,6009.6 C16.1@2980.32,6009.6 3150.4,6009.6 3165,5995 3238.32,5995 U3.1@3240.32,5997 3267,5997 3283.54,6013.54 C17.1@3320.32,6013.54 3361.46,6013.54 3380,5995 3380,5920 3410,5890 3490,5890 3510,5910 ; C13.2@3000.32,5605.46 3000.32,5668.68 2963.25,5705.75 2963.25,5777.25 2983,5797 3123,5797 3127.72,5792.28 3127.72,5770.72 C21.1@3127.72,5737 ; 3220,5505 3375,5505 3395,5505 ; 3380,5380 3395,5395 3395,5500.58 ; C23.1@3535.32,5523.54 3536.78,5525 3580,5525 3630,5575 3630,5665 3510,5785 3510,5910 ; R22.1@3716.85,5882 3716.85,5955.46 U10.5@3715.32,5957 3715.32,6010.32 3722,6017 ; P6.5@3890.32,5672 3898.32,5680 v1(4083.78,5680) 4120,5680 4150,5650 4150,5530 4165,5515 ; C2.1@4048.46,5090 4100,5090 4110,5080 4110,4950 4151.46,4908.54 C33.1@4445.32,4908.54 4461.46,4908.54 4475,4895 4593.59,4895 4604.45,4884.14 R20.2@4604.45,4802 ; C28.2@4083.78,5882 v1(4083.78,5925) 4083.78,5996.22 4063,6017 3532,6017 3510,5995 3510,5910 ; C32.1@4210.32,5519.6 C31.1@4290.32,5519.6 4435.24,5519.6 U9.1@4439.77,5524.13 4439.77,5484.09 C29.1@4496.85,5427 4492.91,5423.06 C36.1@4492.91,5357 v1(4492.91,5245) ; P23.3@5595.32,5034.68 5704.68,5034.68 5758.78,5088.78 R26.1@5758.78,5207 R25.1@5758.78,5307 R24.1@5758.78,5407 R23.1@5758.78,5507 R38.1@5758.78,5607 R37.1@5758.78,5707 R36.1@5758.78,5807 R35.1@5758.78,5907
  Top Layer w50: P28.1@170.32,5775 170.32,5624.68 190,5605 280,5605 345,5540 345,5177 ; P5.1@270.32,5177 472,5177 495,5200 495,5250 520,5275 P3.2@605,5275 ; R20.2@4604.45,4802 4604.45,4740.55 4625,4720 4740,4720 4800,4780 4800,4880 ; v1(4800,5245) 4800,4880 ; P23.1@5595.32,4932 P23.3@5595.32,5032 5595.32,5034.68 5495.32,5034.68 P23.4@5495.32,5032 P23.2@5495.32,4932 5491.89,4928.57 5231.43,4928.57 ; P8.1@5605.32,4225.31 5460,4370.62 5460,4700 5231.43,4928.57 ; 4800,4880 4848.57,4928.57 C38.2@5015.32,4928.57 5231.43,4928.57
  Bottom Layer w20: 1203.25,4736.75 1203.25,4840.78 1302.47,4940 1760,4940 1775,4955 ; D4.2@5241.42,5207 D5.2@5241.42,5307 D6.2@5241.42,5407 D7.2@5241.42,5507 D11.2@5241.42,5607 D10.2@5241.42,5707 D9.2@5241.42,5807 D8.2@5241.42,5907 5241.42,5936.42 5265,5960 5475,5960 5488.78,5946.22 C44.1@5488.78,5907 C45.1@5488.78,5807 C46.1@5488.78,5707 C47.1@5488.78,5607 C43.1@5488.78,5507 C42.1@5488.78,5407 C41.1@5488.78,5307 C40.1@5488.78,5207 5488.78,5038.54 P23.4@5495.32,5032
  Bottom Layer w30: 1203.25,4736.75 1203.25,4691.75 1305,4590 1425,4590 1525,4690 v1(1525,4805) ; v1(1560,5310) 1590,5310 ; v1(1560,5730) 1585,5730 ; 1775,4955 1865,4955 1945,4875 2150.32,4875 v1(2220.32,4805) 2240.32,4825 ; 1805.32,4955 v1(1805.32,5173) 1805.32,5242 ; 1805.32,5795 v1(1805.32,5830.46) ; 1808.6,5792.72 2125.25,5792.72 v1(2163,5830.46) ; v1(2220.32,5241) 2219.32,5242 1805.32,5242 ; v1(2248,5564) 2248,5597 2215,5630 ; v1(2620,5470) 2620,5558 2548,5630 2215,5630 ; v1(4083.78,5680) v1(4083.78,5925) ; 1805.32,5242 v1(1805.32,5596) 1805.32,5615.32 1820,5630 v1(2121,5630) 2215,5630
  Bottom Layer w50: P28.1@170.32,5775 125,5775 90,5810 90,6515 123.18,6548.18 P29.1@170.32,6548.18 ; P3.2@605,5275 750,5275 1080,5605 1080,5850 1262,6032 v1@1640.31,6032 ; 2240.32,4825 P1.6@3250,4825 ; v1(4492.91,5245) v1(4800,5245)
  other v1: 340,4390 2015,5630 4085,5790 1645,6030
VSSA: C1.1 C3.1 C4.1 C25.1 C26.1 C51.1 P2.2 R46.1 R145.2 U1.8 U2.3 | length 2051
  Top Layer w10: v1(2965,5370) 2977.47,5382.47 U1.8@3135.87,5382.47
  Top Layer w30: v1(2965,5085) R46.1@2965,5131.54 ; v1(2965,5370) C26.1@2965,5328.46 C25.1@2905,5328.46 2868.46,5328.46 2855,5315 2855,5160 2865,5150 2946.54,5150 R46.1@2965,5131.54 ; C51.1@3025,5131.54 R46.1@2965,5131.54 ; P2.2@3710,4835 3710,4930 3742.6,4962.6 C1.1@3815,4962.6 3896.06,4962.6 3900,4966.54 3900,4925 ; C4.1@3900,4888.46 3900,4925 ; U2.3@3972.6,4925 3900,4925
  Bottom Layer w30: v1(2965,5085) 3140,5085 3240,4985 3620,4985 3710,4895 P2.2@3710,4835
pads on no net: FD1.3 U7.1 U7.4 U10.1 U10.4 U14.9

## Polygon pours and split planes (outlines as drawn)
VSS on Top Layer "Top Layer-No Net" (solid, pour order 2): 5,7185 380,7185 380,6365 0,6365 5,6370 5,7180
VSS on Top Layer "Top Layer-No Net" (solid, remove dead copper, pour order 0): -5,6425 5905,6425 5900,6420 5900,4780 5895,4775 -10,4775 -15,4775 0,4790 0,6425
VSS on Bottom Layer "Top Layer-No Net" (solid, remove dead copper, pour order 8): -5,5095 450,5095 435,5080 435,4105 370,4040 312.5,3982.5 195,3982.5 90,3982.5 -5,3982.5 0,4040 0,5090
VSS on Bottom Layer "Top Layer-No Net" (solid, remove dead copper, pour order 6): 0,7180 5,7185 380,7185 375,7185 380,7180 380,6370 0,6370 0,7180
VSS on Bottom Layer "Top Layer-No Net" (solid, remove dead copper, pour order 4): 0,6420 5905.51,6420 5910,6415.51 5910,4780 5895,4780 0,4780 0,6420

## Keep-outs
Keep-Out Layer:
  lines w10: 3927.99,3622.05 5905.51,3622.05 ; 3937.01,3622.05 3937.01,3543.31 3937.01,-25 0,-25 0,7559.06 5905.51,7559.06 5905.51,3623.04

## Other copper
Top Layer:
  rectangle net +3V3: 4320,5576 4755,5815
  rectangle net +BAT_PWM: 125,1795 1830,2040
  rectangle net +5V_P: 125,1515 1830,1755
  rectangle net +5V_P: 325,1365 2095,1570
Bottom Layer:
  rectangle net +BAT_PWM: 260,300 3680,460
  rectangle net +BAT_PWM: 260,630 3680,905
  rectangle net +BAT_PWM: 260,3040 3680,3205
  rectangle net +BAT_PWM: 275,2605 3695,2865
  region net +3V3: 4925,5830 4245,5830 4245,5610 4925,5610
  rectangle net +BAT_PWM: 1920,1070 2040,2640
  rectangle net +BAT_PWM: 2040,1070 2095,1580
  rectangle net +BAT_PWM: 840,1780 1965,2065
  rectangle net +5V_P: 20,1520 790,1750
  rectangle net +5V_P: 790,1520 1715,1725
  rectangle net +5V_P: 320,1135 1715,1535
  rectangle net +5V_P: 555,1690 800,2385
  rectangle net +5V_P: 15,2285 140,3510
  rectangle net +5V_P: 15,0 130,1240
  rectangle net +5V_P: 15,-10 3585,125
  rectangle net +BAT_PWM: 1880,845 1970,1660
  rectangle net +BAT_PWM: 1985,1570 2440,2050.63
  rectangle net +BAT_PWM: 2000,2170 2440,2260
  rectangle net +BAT_PWM: 2145,2025 2440,2195
  rectangle net +5V_P: 300,2040 590,2365
  rectangle net +5V_P: 15,1520 100,2325
  rectangle net +5V_P: 110,2360 215,2890
  rectangle net +5V_P: 15,3390 3775,3530
  rectangle net +5V_P: 100,100 175,190
  rectangle net +5V_P: 105,645 225,905

## Silkscreen, mask and mechanical layers (free items; w line width, h text height)
Top Overlay:
  lines w10: 0,3543.31 3937.01,3543.31 ; 0,3622.05 3937,3622.05 ; 335,5580 335,5545 ; 345,4930 345,4905 ; 370,5545 335,5545 ; 375,4905 345,4905 ; 415,5985 410,5980 ; 745,5745 745,5605 770,5580 1028.12,5580 1065,5616.88 1065,5970 1025,6010 765,6010 745,5990 745,5735 720,5710 555,5710 455,5610 455,5015 345,4905 ; 335,5545 385,5595 385,5760 410,5785 ; 410,5785 445,5750 680,5750 715,5785 715,5980 680,6015 475,6015 445,6015 410,5980 ; 410,5785 410,5980 ; 3937.01,3622.05 5905.51,3622.05 5905.51,7559.06 0,7559.06 0,3583 0,-25 3937.01,-25 3937.01,3622.05
  text "NC  COM  NO" at 530.32,7472 h39.37
  text "NC  COM  NO" at 1150.32,7472 h39.37
  text "NC  COM  NO" at 1780.32,7472 h39.37
  text "NC  COM  NO" at 2410.32,7472 h39.37
  text "NC  COM  NO" at 3040.32,7472 h39.37
  text "NC  COM  NO" at 3670.32,7472 h39.37
  text "NC  COM  NO" at 4300.32,7472 h39.37
  text "NC  COM  NO" at 4930.32,7472 h39.37
  text "+5V" at 250,7035 h19.68
  text "+5V" at 250,6940 h19.68
  text "I2C SDA" at 250,6840 h19.68
  text "I2C SCL" at 250,6735 h19.68
  text "PWM OE" at 250,6635 h19.68
  text "I2C PWM 16-31" at 75,6592.74 h34.25 r90
  text "GND" at 250,6535 h19.68
  text "RS485:  A    B    GND" at 5840.32,6327 h34.25 r90
  text "+5V" at 245,6255 h19.68
  text "I-MEDIA GROUP d.o.o. Sarajevo / Federacija BiH,Bosna i Hercegovina / www.imedia.ba       info@imedia.ba" at 485,6185 h34.25
  text "+5V" at 245,6160 h19.68
  text "I2C SDA" at 245,6060 h19.68
  text "DIN +5V" at 5705.32,6027 h34.25 r90
  text "I2C SCL" at 245,5955 h19.68
  text "PWM OE" at 245,5855 h19.68
  text "I2C PWM 0-15" at 75,5830.97 h34.25 r90
  text "P5 PINOUT /  / 8 - NRF24L01 IRQ / 7 - SPI MISO / 6 - SPI MOSI / 5 - SPI SCK / 4 - NRF24L01 CSN / 3 - NRF24L01 CE / 2 - +3V3 / 1 - GND" at 440,5775 h15.75
  text "GND" at 245,5755 h19.68
  text "RADIO / RECEIVER / IRC0816" at 4775,5620 h39.37
  text "P4 PINOUT /  / 14 - GND / 13 - GND / 12 - NRF905 CSN / 11 - SPI SCK / 10 - SPI MOSI / 9  - SPI MISO / 8  - NRF905 DR / 7  - NRF905 AM / 6  - NRF905 CD / 5  - NRF905 UCLK / 4  - NRF905 PWR UP / 3  - NRF905 TRX CE / 2  - NRF905 TX EN / 1  - +3V3" at 765,5605 h15.75
  text "ICSP" at 3820,5425 h34.25 r90
  text "5 - HC12 SET / 4 - USART TX / 3 - USART RX / 2 - GND / 1 - VDD" at 680,5360 h19.68
  text "NRF24L01" at 75,5210 h34.25 r90
  text "GND" at 340,5160 h19.68
  text "HC12 / ESP2866" at 530,5145 h34.25 r90
  text "+3V3" at 35,5125 h19.68
  text "1" at 610,5100 h19.68 r90
  text "SPI EXPANDER" at 3240,5000 h19.68
  text "DIN GND" at 5705.32,4882 h34.25 r90
  text "GND" at 335,4830 h19.68
  text "DIGITAL INPUT  0  1  2  3  4  5  6  7" at 5840.32,4687 h34.25 r90
  text "NRF905" at 75,4439.98 h34.25 r90
  text "+3V3" at 330,4225 h19.68
  text "POWER: GND  +24V" at 5840.32,3942 h34.25 r90
  text "NO  COM  NC" at 520.32,3702 h39.37
  text "NO  COM  NC" at 1150.32,3702 h39.37
  text "NO  COM  NC" at 1780.32,3702 h39.37
  text "NO  COM  NC" at 2410.32,3702 h39.37
  text "NO  COM  NC" at 3040.32,3702 h39.37
  text "NO  COM  NC" at 3670.32,3702 h39.37
  text "NO  COM  NC" at 4300.32,3702 h39.37
  text "NO  COM  NC" at 4930.32,3702 h39.37
  text "PWM0 GND" at 195,3480 h39.37
  text "PWM1 GND" at 660,3480 h39.37
  text "PWM2 GND" at 1140,3480 h39.37
  text "PWM3 GND" at 1620,3480 h39.37
  text "PWM4 GND" at 2085,3480 h39.37
  text "PWM5 GND" at 2565,3480 h39.37
  text "PWM6 GND" at 3035,3480 h39.37
  text "PWM7 GND" at 3510,3480 h39.37
  text "I-MEDIA GROUP d.o.o. Sarajevo / Federacija BiH,Bosna i Hercegovina / www.imedia.ba       info@imedia.ba" at 370,2085 h34.25
  text "+24V" at 125,1990 h39.37
  text "PWM DRIVER / IPD1624" at 3035,1970 h39.37
  text "GND" at 125,1515 h39.37
  text "PWM INPUT" at 3850,1515 h39.37 r90
  text "GND P14 P12 P10 P8 P6 P4  P2  P0" at 3485,1285 h28 r90
  text "GND P15 P13 P11 P9 P7 P5  P3  P1" at 3750,1285 h28 r90
  text "GND PWM15" at 145,-15 h39.37
  text "GND PWM14" at 635,-15 h39.37
  text "GND PWM13" at 1090,-15 h39.37
  text "GND PWM12" at 1575,-15 h39.37
  text "GND PWM11" at 2050,-15 h39.37
  text "GND PWM10" at 2515,-15 h39.37
  text "GND PWM9" at 3000,-15 h39.37
  text "GND PWM8" at 3465,-15 h39.37
Mechanical 1:
  lines w10: 0,3585 2.32,3582.68 ; 4000,3545 3970,3575 ; 4000,3605 3970,3575 ; 5520,3105 4470,3105 4030,3545 4000,3575 3970,3575
  lines w39.37: 2.32,3582.68 3937.01,3582.68
  text "V-SHAPE OR  HOLES" at 4495,3145 h60

## Text inside footprints (layer, text, board x,y; h text height)
C38: Top Overlay "+" at 4985.79,5281.92 h20 r270
C52: Top Overlay "+" at 2645.47,1591.5 h20 r270
C56: Top Overlay "+" at 2060.47,2246.5 h20 r270
C79: Top Overlay "+" at 905.47,2114.67 h59.06 r270
C80: Top Overlay "+" at 1580.47,2114.67 h59.06 r270
P1: Top Overlay "1" at 3520,4915 h20; Top Overlay "2" at 3520,4815 h20; Top Overlay "5" at 3170,4925 h20; Top Overlay "6" at 3170,4815 h20
P4: Top Overlay "13" at 285,4905 h20 r90; Top Overlay "14" at 175,4905 h20 r90; Top Overlay "1" at 285,4170 h20 r90; Top Overlay "2" at 175,4165 h20 r90
P5: Top Overlay "8" at 190.32,5537 h20 r90; Top Overlay "7" at 290.32,5537 h20 r90; Top Overlay "1" at 285,5105 h20 r90; Top Overlay "2" at 175,5100 h20 r90
P11: Top Overlay "3" at 5615.32,6237 h20 r90; Top Overlay "4" at 5515.32,6237 h20 r90; Top Overlay "2" at 5505,5995 h20 r90; Top Overlay "1" at 5615.32,5997 h20 r90
P23: Top Overlay "3" at 5615.32,5092 h20 r90; Top Overlay "4" at 5515.32,5092 h20 r90; Top Overlay "2" at 5505,4855 h20 r90; Top Overlay "1" at 5615.32,4852 h20 r90
P47: Top Overlay "2" at 3640,2225 h20 r270; Top Overlay "1" at 3530,2220 h20 r270; Top Overlay "17" at 3535,1275 h20 r270; Top Overlay "18" at 3650,1270 h20 r270
U8: Top Overlay "3" at 4485,5286.37 h20 r180; Top Overlay "2" at 4585,5286.37 h20 r180; Top Overlay "1" at 4675.16,5286.37 h20 r180